# Altium PCB MMC_2_2.PcbDoc (part 2 of 2)
Units mm, origin at the board's own origin, x right, y up, seen from the top; angles counter-clockwise.
Board outline 99.21 x 82.02 mm, 4 copper layers (Top Layer, 3V3, GND, Bottom Layer), stack 0.778 mm thick; 83 components, 83 nets, 360 pads, 124 vias.
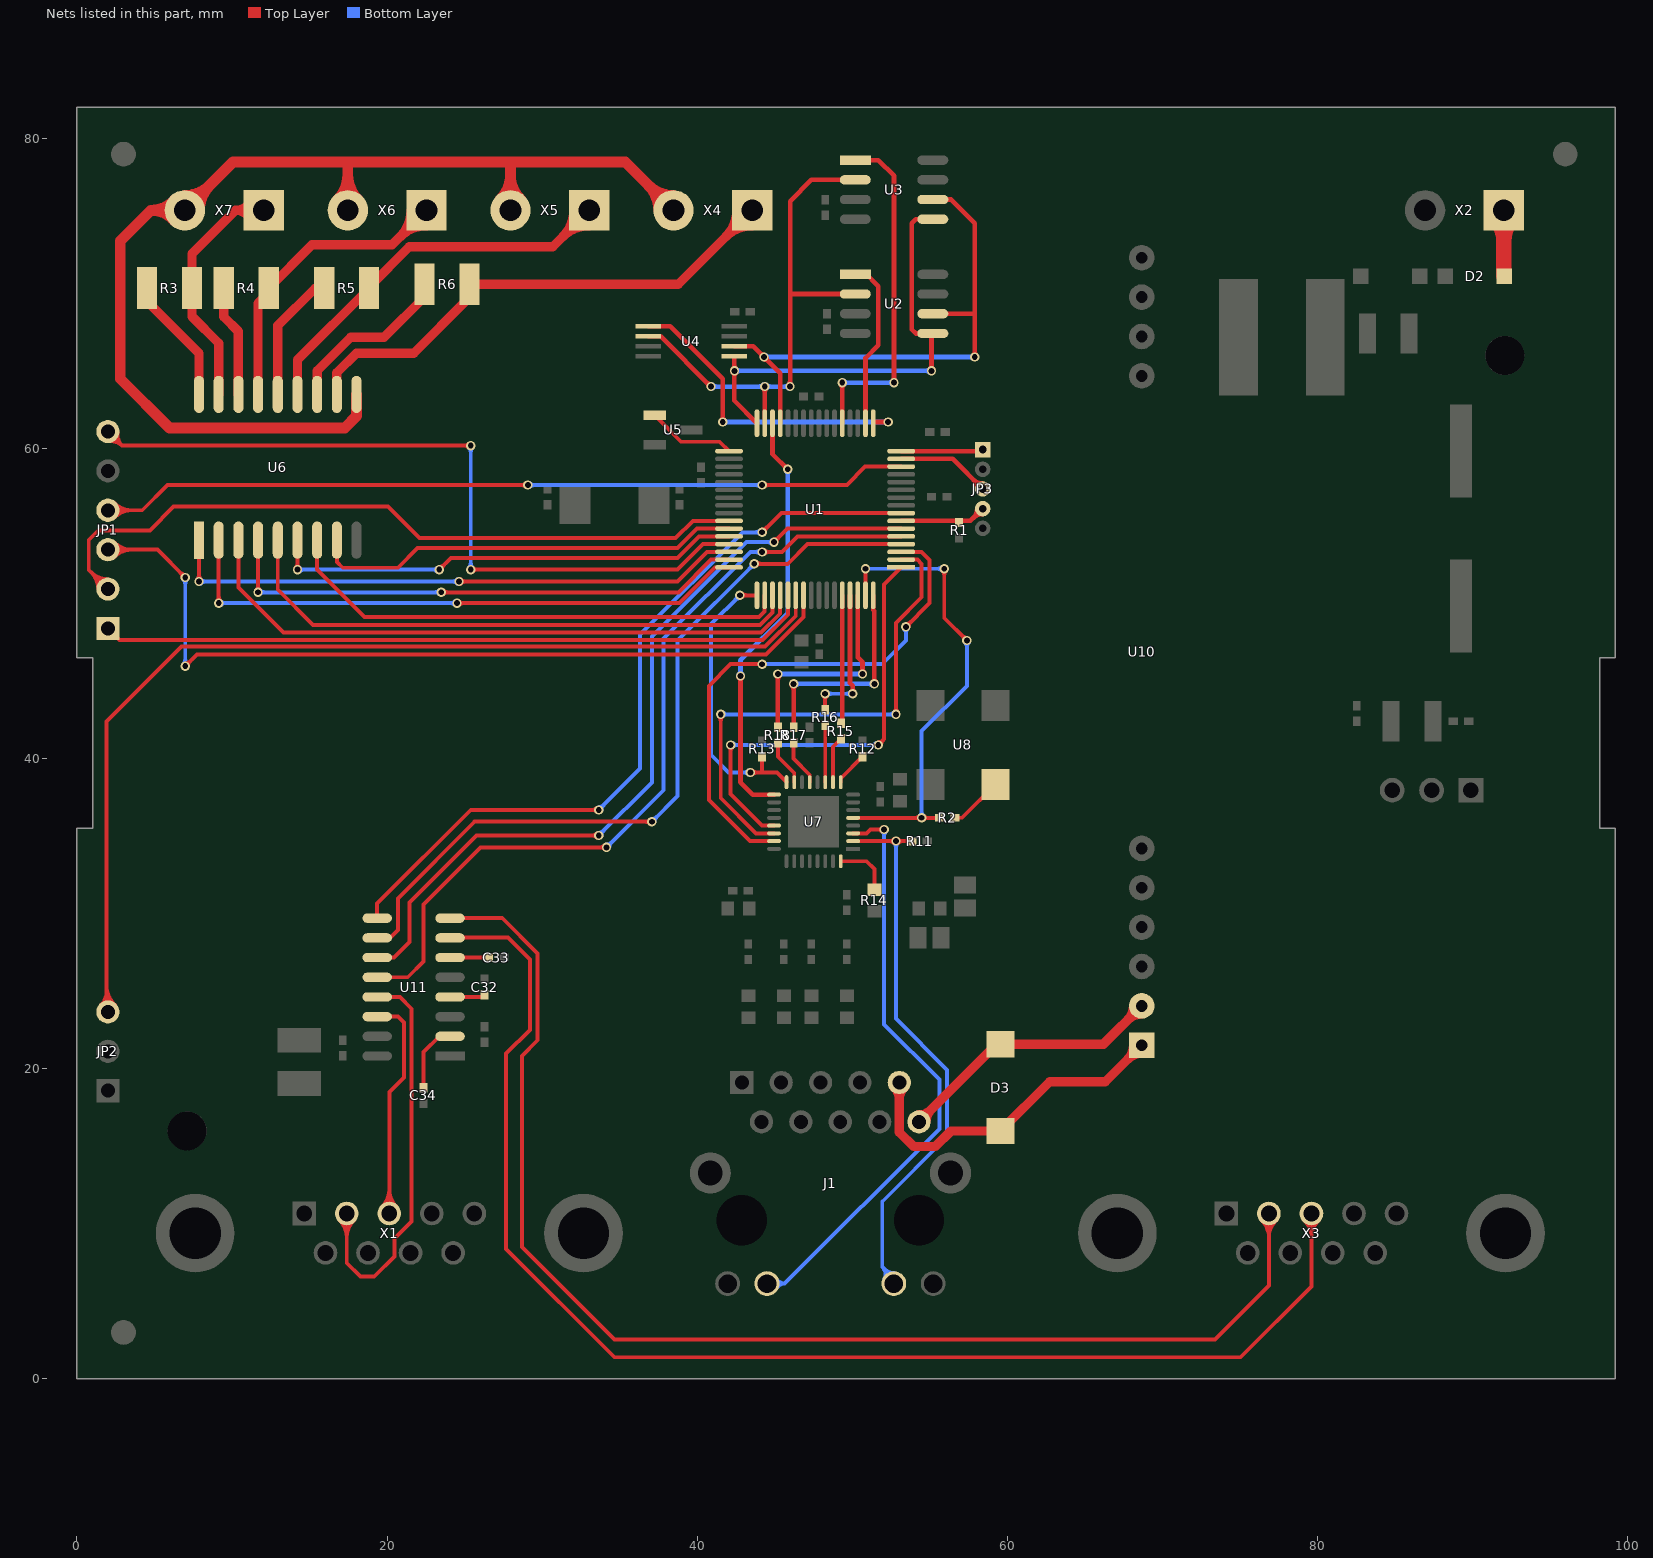
[diagram p4: the nets of this part, all layers, seen from the top]

## Via types
v1: diameter 0.6, hole 0.381, Top Layer to Bottom Layer, 114 vias
v2: diameter 0.66, hole 0.33, Top Layer to Bottom Layer, tented top, 9 vias
v3: diameter 1.2, hole 0.711, Top Layer to Bottom Layer, 1 vias

## Nets (pads, with @x,y where several pads share a name; then routed paths per layer and width w, separated by ;. In a path a pad name is that pad's centre, name@x,y a point inside that pad or via, vN(x,y) a via of type N, cw(c..) or ccw(c..) an arc to the next point about the centre after c; other vN are vias at no path point) (continued)
NetC32_2: C32.2 U11.4 | length 2.3
  Top Layer w0.254: U11.4@24.067,24.638 26.154,24.638 C32.2@26.289,24.773
NetC33_1: C33.1 U11.6 | length 2.5
  Top Layer w0.254: U11.6@24.067,27.178 C33.1@26.551,27.178
NetC34_1: C34.1 U11.2 | length 4.4
  Top Layer w0.254: C34.1@22.352,18.788 22.352,21.082 23.368,22.098 U11.2@24.067,22.098
NetD2_2: D2.2 X2.1 | length 7.3
  Top Layer w1: X2.1@91.474,74.814 cw(c90.109,73.449) 92.04,73.449 cw(c93.971,73.449) X2.1@92.606,74.814 ; X2.1@92.04,75.38 92.04,71.155 D2.2@92.075,71.12
NetD3_1: D3.1 J1.9 U10.1 | length 25.6
  Top Layer w0.6: J1.9@52.727,18.802 cw(c51.959,18.034) 53.045,18.034 cw(c54.131,18.034) J1.9@53.363,18.802 ; J1.9@53.045,19.12 53.045,15.916 53.975,14.986 55.372,14.986 56.382,15.996 D3.1@59.563,15.996 62.744,19.177 66.337,19.177 U10.1@68.68,21.52 ; U10.1@68.155,21.52 cw(c66.888,21.52) 67.784,20.624 cw(c68.68,19.728) U10.1@68.68,20.995
NetD3_2: D3.2 J1.10 U10.2 | length 21.2
  Top Layer w0.6: J1.10@54.315,16.58 59.331,21.596 D3.2@59.563,21.596 66.216,21.596 U10.2@68.68,24.06 ; J1.10@54.315,17.03 ccw(c54.315,18.116) 55.083,17.348 ccw(c55.851,16.58) J1.10@54.765,16.58 ; U10.2@68.155,24.06 cw(c66.888,24.06) 67.784,23.164 cw(c68.68,22.268) U10.2@68.68,23.535
NetJ1_11: J1.11 U7.3 | length 40.8
  Top Layer w0.254: U7.3@50.069,35.191 50.939,35.191 51.181,35.433 v1(52.07,35.433) ; v1@51.948,35.311 ccw(c51.652,35.015) 51.652,35.433 ccw(c51.652,35.851) v1@51.948,35.555
  Bottom Layer w0.254: J1.11@44.51,6.15 45.647,6.15 55.626,16.129 55.626,19.304 52.07,22.86 v1(52.07,35.433) ; J1.11@45.1,5.826 cw(c45.647,5.526) 45.647,6.15 cw(c45.647,6.774) J1.11@45.1,6.474 ; v1@51.948,35.311 cw(c51.652,35.015) 52.07,35.015 cw(c52.488,35.015) v1@52.192,35.311
NetJ1_13: J1.13 R11.2 U7.2 | length 39.6
  Top Layer w0.254: U7.2@50.069,34.691 v1(52.832,34.691) 53.828,34.691 R11.2@53.848,34.671 ; v1@52.71,34.569 ccw(c52.414,34.273) 52.414,34.691 ccw(c52.414,35.109) v1@52.71,34.813 ; v1@52.954,34.569 cw(c53.25,34.273) 53.25,34.691 cw(c53.25,35.109) v1@52.954,34.813
  Bottom Layer w0.254: J1.13@52.082,6.438 ccw(c51.444,6.74) 51.943,7.239 ; 52.125,7.057 ccw(c52.69,7.622) J1.13@52.69,6.823 ; 52.198,6.984 cw(c51.79,6.576) J1.13@52.311,6.329 ; J1.13@52.705,6.477 51.943,7.239 ; v1@52.71,34.569 cw(c52.414,34.273) 52.832,34.273 cw(c53.25,34.273) v1@52.954,34.569 ; v1(52.832,34.691) 52.832,23.241 56.134,19.939 56.134,15.621 51.943,11.43 51.943,7.239
NetJP1_1: JP1.1 U1.53 | length 46.1
  Top Layer w0.254: JP1.1@2,48.41 2.753,47.657 44.228,47.657 45.863,49.292 U1.53@45.863,50.546
NetJP1_2: JP1.2 U1.42 | length 50.9
  Top Layer w0.254: JP1.2@1.377,50.95 ccw(c-0.127,50.95) 0.936,52.014 ccw(c2,53.077) JP1.2@2,51.573 ; JP1.2@1.631,50.95 ccw(c0.74,50.95) 1.37,51.58 ccw(c2,52.21) JP1.2@2,51.319 ; JP1.2@2,50.95 0.762,52.188 0.762,54.102 1.397,54.737 4.699,54.737 6.223,56.261 20.066,56.261 22.098,54.229 38.608,54.229 39.725,55.346 U1.42@42.063,55.346
NetJP1_3: JP1.3 U1.55 | length 60.4
  Top Layer w0.254: JP1.3@2,53.49 5.184,53.49 v1(6.985,51.689) ; JP1.3@2.261,53.229 cw(c2.891,52.599) 2.891,53.49 cw(c2.891,54.381) JP1.3@2.261,53.751 ; JP1.3@2.441,53.049 cw(c3.504,51.986) 3.504,53.49 cw(c3.504,54.994) JP1.3@2.441,53.931 ; v1@6.812,51.689 ccw(c6.394,51.689) 6.69,51.984 ccw(c6.985,52.28) v1@6.985,51.862 ; v1(6.985,45.974) 7.747,46.736 44.45,46.736 46.863,49.149 U1.55@46.863,50.546 ; v1@6.985,46.147 ccw(c6.985,46.565) 7.28,46.269 ccw(c7.576,45.974) v1@7.158,45.974
  Bottom Layer w0.254: v1@6.863,46.096 ccw(c6.567,46.392) 6.985,46.392 ccw(c7.403,46.392) v1@7.107,46.096 ; v1@6.863,51.567 cw(c6.567,51.271) 6.985,51.271 cw(c7.403,51.271) v1@7.107,51.567 ; v1(6.985,45.974) v1(6.985,51.689)
NetJP1_4: JP1.4 U1.14 | length 58.7
  Top Layer w0.254: JP1.4@2,56.03 4.214,56.03 5.842,57.658 v1(29.083,57.658) ; JP1.4@2.261,55.769 cw(c2.891,55.139) 2.891,56.03 cw(c2.891,56.921) JP1.4@2.261,56.291 ; JP1.4@2.441,55.589 cw(c3.504,54.526) 3.504,56.03 cw(c3.504,57.534) JP1.4@2.441,56.471 ; v1@28.961,57.536 ccw(c28.665,57.24) 28.665,57.658 ccw(c28.665,58.076) v1@28.961,57.78 ; v1(44.196,57.658) 49.657,57.658 50.845,58.846 U1.14@53.163,58.846 ; v1@44.318,57.536 cw(c44.614,57.24) 44.614,57.658 cw(c44.614,58.076) v1@44.318,57.78
  Bottom Layer w0.254: v1(29.083,57.658) v1(44.196,57.658) ; v1@29.205,57.536 cw(c29.501,57.24) 29.501,57.658 cw(c29.501,58.076) v1@29.205,57.78 ; v1@44.074,57.536 ccw(c43.778,57.24) 43.778,57.658 ccw(c43.778,58.076) v1@44.074,57.78
NetJP1_6: JP1.6 U1.45 | length 54.7
  Top Layer w0.254: JP1.6@2,61.11 2.912,60.198 ; JP1.6@2.042,60.743 cw(c2.112,60.141) 2.54,60.57 cw(c2.969,60.998) JP1.6@2.367,61.068 ; JP1.6@2.071,60.491 cw(c2.188,59.474) 2.912,60.198 ; JP1.6@2.619,61.039 ccw(c3.636,60.922) 2.912,60.198 ; v1@25.278,60.076 ccw(c24.982,59.78) 24.982,60.198 ccw(c24.982,60.616) v1@25.278,60.32 ; v1(25.4,60.198) 2.912,60.198 ; v1(25.4,52.2) 38.738,52.2 40.384,53.846 U1.45@42.063,53.846 ; v1@25.522,52.078 cw(c25.818,51.782) 25.818,52.2 cw(c25.818,52.618) v1@25.522,52.322
  Bottom Layer w0.254: v1@25.278,52.322 ccw(c24.982,52.618) 25.4,52.618 ccw(c25.818,52.618) v1@25.522,52.322 ; v1@25.278,60.076 cw(c24.982,59.78) 25.4,59.78 cw(c25.818,59.78) v1@25.522,60.076 ; v1(25.4,52.2) v1(25.4,60.198)
NetJP2_3: JP2.3 U1.54 | length 70.6
  Top Layer w0.254: JP2.3@1.559,24.111 ccw(c0.725,24.945) 1.905,24.945 ; 1.905,24.79 ccw(c3.12,24.79) JP2.3@2.261,23.931 ; 1.905,25.403 ccw(c3.733,25.403) JP2.3@2.441,24.111 ; JP2.3@2.159,23.876 1.905,24.13 1.905,42.418 6.731,47.244 44.387,47.244 46.363,49.22 U1.54@46.363,50.546
NetJP3_1: JP3.1 U1.16 | length 5.3
  Top Layer w0.3: U1.16@53.163,59.846 58.322,59.846 JP3.1@58.42,59.944
NetJP3_3: JP3.3 U1.15 | length 7.4
  Top Layer w0.3: U1.15@53.163,59.346 56.478,59.346 JP3.3@58.42,57.404 ; JP3.3@58.07,57.404 ccw(c57.225,57.404) 57.823,58.001 ccw(c58.42,58.599) JP3.3@58.42,57.754
NetJP3_4: JP3.4 R1.1 U1.7 | length 6.9
  Top Layer w0.3: U1.7@53.163,55.346 57.632,55.346 JP3.4@58.42,56.134 ; JP3.4@58.07,56.134 cw(c57.225,56.134) 57.823,55.537 cw(c58.42,54.939) JP3.4@58.42,55.784
NetR2_1: R2.1 U8.3 | length 3.5
  Top Layer w0.254: R2.1@56.634,36.195 57.091,36.195 U8.3@59.25,38.354
NetR2_2: R2.2 U1.63 U7.5 | length 34.8
  Top Layer w0.254: U7.5@50.069,36.191 55.63,36.191 R2.2@55.634,36.195 ; U1.63@50.863,50.546 v1(50.863,52.26) ; 54.056,36.191 ccw(c54.056,36.622) v1@54.361,36.317 ; 54.075,36.191 cw(c54.075,35.787) v1@54.361,36.073 ; v1@54.605,36.073 cw(c54.891,35.787) 54.891,36.191 ; v1@54.605,36.317 ccw(c54.91,36.622) 54.91,36.191 ; v1@55.821,52.138 cw(c55.525,51.842) 55.943,51.842 cw(c56.361,51.842) v1@56.065,52.138 ; v1(55.943,52.26) 55.943,49.086 v1(57.404,47.625) ; v1@57.231,47.625 ccw(c56.813,47.625) 57.109,47.92 ccw(c57.404,48.216) v1@57.404,47.798
  Bottom Layer w0.254: v1(50.863,52.26) v1(55.943,52.26) ; v1@54.361,36.317 ccw(c54.065,36.613) 54.483,36.613 ccw(c54.901,36.613) v1@54.605,36.317 ; v1(54.483,36.195) 54.483,41.783 57.404,44.704 v1(57.404,47.625) ; v1@55.821,52.138 ccw(c55.525,51.842) 55.525,52.26 ccw(c55.525,52.678) v1@55.821,52.382 ; v1@57.282,47.503 cw(c56.986,47.207) 57.404,47.207 cw(c57.822,47.207) v1@57.526,47.503
NetR3_1: R3.1 U6.18 | length 8.2
  Top Layer w0.6: R3.1@4.519,70.358 4.572,70.305 4.572,69.469 7.874,66.167 U6.18@7.874,63.501
NetR3_2: R3.2 U6.17 X7.1 | length 18.2
  Top Layer w0.6: U6.17@9.144,63.501 9.144,66.802 7.419,68.527 R3.2@7.419,70.358 7.419,72.57 10.229,75.38 ; X7.1@11.194,74.847 ccw(c10.229,74.24) 10.229,75.38 ; X7.1@11.194,75.913 cw(c10.229,76.52) 10.229,75.38 ; X7.1@12.04,75.082 X7.1@12.04,75.38 10.229,75.38
NetR4_1: R4.1 U6.16 | length 7.2
  Top Layer w0.6: R4.1@9.472,70.358 9.472,68.506 10.414,67.564 U6.16@10.414,63.501
NetR4_2: R4.2 U6.15 X6.1 | length 23.1
  Top Layer w0.6: U6.15@11.684,63.501 11.684,69.363 R4.2@12.525,70.205 ; R4.2@12.372,70.358 15.166,73.152 20.322,73.152 X6.1@22.55,75.38 ; X6.1@21.55,75.38 cw(c19.136,75.38) 20.843,73.673 cw(c22.55,71.966) X6.1@22.55,74.38
NetR5_1: R5.1 U6.14 | length 8.4
  Top Layer w0.6: U6.14@12.954,63.501 12.954,67.945 15.367,70.358 R5.1@15.949,70.358
NetR5_2: R5.2 U6.13 X5.1 | length 28.9
  Top Layer w0.6: U6.13@14.224,63.501 14.224,65.733 R5.2@18.849,70.358 18.849,70.433 21.441,73.025 30.685,73.025 X5.1@33.04,75.38 ; X5.1@32.04,75.38 cw(c29.626,75.38) 31.333,73.673 cw(c33.04,71.966) X5.1@33.04,74.38
NetR6_1: R6.1 U6.12 | length 11.2
  Top Layer w0.6: U6.12@15.494,63.501 15.494,65.024 17.653,67.183 19.812,67.183 22.426,69.797 R6.1@22.426,70.612
NetR6_2: R6.2 U6.11 X4.1 | length 36.5
  Top Layer w0.6: U6.11@16.764,63.501 16.764,64.897 18.034,66.167 21.717,66.167 25.146,69.596 R6.2@25.146,70.358 ; R6.2@25.326,70.612 38.787,70.612 X4.1@43.555,75.38 ; X4.1@42.555,75.38 cw(c40.141,75.38) 41.848,73.673 cw(c43.555,71.966) X4.1@43.555,74.38
NetR12_1: R12.1 U7.9 | length 2.2
  Top Layer w0.254: U7.9@49.269,38.491 49.269,38.736 R12.1@50.673,40.14
NetR13_1: R13.1 U1.49 U7.16 | length 21.5
  Top Layer w0.254: v1(42.76,50.546) U1.49@43.863,50.546 ; v1@42.882,50.424 cw(c43.177,50.128) 43.177,50.546 cw(c43.177,50.964) v1@42.882,50.668 ; v1(43.434,39.116) 44.196,39.116 ; v1@43.556,38.994 cw(c43.852,38.698) 43.852,39.116 cw(c43.852,39.534) v1@43.556,39.238 ; R13.1@44.188,40.072 44.188,40.132 R13.1@44.196,40.14 44.196,39.116 ; U7.16@45.769,38.491 45.144,39.116 44.196,39.116
  Bottom Layer w0.254: v1@42.587,50.546 cw(c42.169,50.546) 42.464,50.251 cw(c42.76,49.955) v1@42.76,50.373 ; v1(42.76,50.546) 40.894,48.68 40.894,40.259 42.037,39.116 v1(43.434,39.116) ; v1@43.312,38.994 ccw(c43.016,38.698) 43.016,39.116 ccw(c43.016,39.534) v1@43.312,39.238
NetR14_2: R14.2 U7.32 | length 3.7
  Top Layer w0.254: U7.32@49.269,33.391 50.937,33.391 51.435,32.893 R14.2@51.435,31.561
NetR15_1: R15.1 U7.10 | length 3
  Top Layer w0.254: U7.10@48.769,38.491 48.769,40.776 R15.1@49.276,41.283
NetR15_2: R15.2 U1.60 | length 8.3
  Top Layer w0.254: R15.2@49.276,42.283 R15.2@49.363,42.37
  Top Layer w0.3: R15.2@49.363,42.37 U1.60@49.363,50.546
NetR16_1: R16.1 U7.11 | length 3.7
  Top Layer w0.254: R16.1@48.26,42.172 48.269,42.163 U7.11@48.269,38.491
NetR16_2: R16.2 U1.61 | length 11.8
  Top Layer w0.254: v1@48.138,44.074 cw(c47.842,43.778) 48.26,43.778 cw(c48.678,43.778) v1@48.382,44.074 ; R16.2@48.26,43.172 v1(48.26,44.196)
  Top Layer w0.3: U1.61@49.863,50.546 49.863,44.879 50.038,44.704 v1(50.038,44.196) ; v1@49.932,44.302 ccw(c49.676,44.558) 50.038,44.558 ccw(c50.4,44.558) v1@50.144,44.302
  Bottom Layer w0.254: v1(48.26,44.196) v1(50.038,44.196) ; v1@48.382,44.074 cw(c48.678,43.778) 48.678,44.196 cw(c48.678,44.614) v1@48.382,44.318 ; v1@49.916,44.074 ccw(c49.62,43.778) 49.62,44.196 ccw(c49.62,44.614) v1@49.916,44.318
NetR17_1: R17.1 U7.13 | length 3
  Top Layer w0.254: R17.1@46.228,41.029 46.228,40.005 47.269,38.964 U7.13@47.269,38.491
NetR17_2: R17.2 U1.64 | length 16
  Top Layer w0.3: v1@46.122,44.725 cw(c45.866,44.469) 46.228,44.469 cw(c46.59,44.469) v1@46.334,44.725 ; R17.2@46.228,42.029 v1(46.228,44.831) ; v1@51.329,44.937 ccw(c51.073,45.193) 51.435,45.193 ccw(c51.797,45.193) v1@51.541,44.937 ; U1.64@51.363,50.546 51.363,49.602 51.435,49.53 v1(51.435,44.831)
  Bottom Layer w0.3: v1(46.228,44.831) v1(51.435,44.831) ; v1@46.334,44.725 cw(c46.59,44.469) 46.59,44.831 cw(c46.59,45.193) v1@46.334,44.937 ; v1@51.329,44.725 ccw(c51.073,44.469) 51.073,44.831 ccw(c51.073,45.193) v1@51.329,44.937
NetR18_1: R18.1 U7.15 | length 3
  Top Layer w0.254: R18.1@45.212,41.029 45.212,40.132 46.269,39.075 U7.15@46.269,38.491
NetR18_2: R18.2 U1.62 | length 16.4
  Top Layer w0.3: v1@45.106,45.36 cw(c44.85,45.104) 45.212,45.104 cw(c45.574,45.104) v1@45.318,45.36 ; R18.2@45.212,42.029 v1(45.212,45.466) ; U1.62@50.363,50.546 50.363,46.538 50.673,46.228 v1(50.673,45.466) ; v1@50.567,45.572 ccw(c50.311,45.828) 50.673,45.828 ccw(c51.035,45.828) v1@50.779,45.572
  Bottom Layer w0.3: v1(45.212,45.466) v1(50.673,45.466) ; v1@45.318,45.36 cw(c45.574,45.104) 45.574,45.466 cw(c45.574,45.828) v1@45.318,45.572 ; v1@50.567,45.36 ccw(c50.311,45.104) 50.311,45.466 ccw(c50.311,45.828) v1@50.567,45.572
NetU1_1: U1.1 U7.21 | length 31
  Top Layer w0.254: v1@42.042,40.772 cw(c41.746,40.476) 42.164,40.476 cw(c42.582,40.476) v1@42.286,40.772 ; v1(42.164,40.894) 42.164,37.719 44.192,35.691 U7.21@44.969,35.691 ; v1(51.689,40.894) 52.07,41.275 52.07,51.253 U1.1@53.163,52.346 ; v1@51.689,41.067 ccw(c51.689,41.485) 51.984,41.189 ccw(c52.28,40.894) v1@51.862,40.894
  Bottom Layer w0.254: v1(42.164,40.894) v1(51.689,40.894) ; v1@42.286,40.772 cw(c42.582,40.476) 42.582,40.894 cw(c42.582,41.312) v1@42.286,41.016 ; v1@51.567,40.772 ccw(c51.271,40.476) 51.271,40.894 ccw(c51.271,41.312) v1@51.567,41.016
NetU1_2: U1.2 U7.22 | length 35.5
  Top Layer w0.254: v1@41.407,42.746 cw(c41.111,42.45) 41.529,42.45 cw(c41.947,42.45) v1@41.651,42.746 ; v1(41.529,42.868) 41.529,37.465 43.803,35.191 U7.22@44.969,35.191 ; v1@52.71,42.99 ccw(c52.414,43.286) 52.832,43.286 ccw(c53.25,43.286) v1@52.954,42.99 ; v1(52.832,42.868) 52.832,48.768 54.483,50.419 54.483,52.578 54.215,52.846 U1.2@53.163,52.846
  Bottom Layer w0.254: v1(41.529,42.868) v1(52.832,42.868) ; v1@41.651,42.746 cw(c41.947,42.45) 41.947,42.868 cw(c41.947,43.286) v1@41.651,42.99 ; v1@52.71,42.746 ccw(c52.414,42.45) 52.414,42.868 ccw(c52.414,43.286) v1@52.71,42.99
NetU1_3: U1.3 U7.23 | length 35.8
  Top Layer w0.254: v1(44.196,46.101) 42.164,46.101 40.767,44.704 40.767,37.338 43.414,34.691 U7.23@44.969,34.691 ; U1.3@53.163,53.346 54.477,53.346 54.991,52.832 54.991,50.038 v1(53.467,48.514) ; v1@53.467,48.687 ccw(c53.467,49.105) 53.762,48.809 ccw(c54.058,48.514) v1@53.64,48.514
  Bottom Layer w0.254: v1(44.196,46.101) 51.943,46.101 53.467,47.625 v1(53.467,48.514) ; v1@53.345,48.392 cw(c53.049,48.096) 53.467,48.096 cw(c53.885,48.096) v1@53.589,48.392
NetU1_4: U1.4 U11.10 | length 54
  Top Layer w0.254: U11.10@19.367,28.448 20.193,28.448 20.701,28.956 20.701,30.988 25.654,35.941 v1(37.084,35.941) ; v1@36.962,35.819 ccw(c36.666,35.523) 36.666,35.941 ccw(c36.666,36.359) v1@36.962,36.063 ; v1(43.688,52.578) 45.847,52.578 47.115,53.846 U1.4@53.163,53.846 ; v1@43.81,52.456 cw(c44.106,52.16) 44.106,52.578 cw(c44.106,52.996) v1@43.81,52.7
  Bottom Layer w0.254: v1(37.084,35.941) 38.735,37.592 38.735,47.625 v1(43.688,52.578) ; v1@37.084,36.114 ccw(c37.084,36.532) 37.379,36.236 ccw(c37.675,35.941) v1@37.257,35.941 ; v1@43.515,52.578 cw(c43.097,52.578) 43.393,52.283 cw(c43.688,51.987) v1@43.688,52.405
NetU1_5: U1.5 U11.12 | length 56.1
  Top Layer w0.254: U11.12@19.367,25.908 21.336,25.908 22.352,26.924 22.352,30.607 26.035,34.29 v1(34.163,34.29) ; v1@34.041,34.168 ccw(c33.745,33.872) 33.745,34.29 ccw(c33.745,34.708) v1@34.041,34.412 ; v1(44.196,53.34) 45.466,53.34 46.472,54.346 U1.5@53.163,54.346 ; v1@44.318,53.218 cw(c44.614,52.922) 44.614,53.34 cw(c44.614,53.758) v1@44.318,53.462
  Bottom Layer w0.254: v1(34.163,34.29) 37.846,37.973 37.846,47.752 43.434,53.34 v1(44.196,53.34) ; v1@34.163,34.463 ccw(c34.163,34.881) 34.458,34.585 ccw(c34.754,34.29) v1@34.336,34.29 ; v1@44.074,53.218 ccw(c43.778,52.922) 43.778,53.34 ccw(c43.778,53.758) v1@44.074,53.462
NetU1_6: U1.6 U11.11 | length 55
  Top Layer w0.254: U11.11@19.367,27.178 20.447,27.178 21.463,28.194 21.463,30.734 25.781,35.052 v1(33.655,35.052) ; v1@33.533,34.93 ccw(c33.237,34.634) 33.237,35.052 ccw(c33.237,35.47) v1@33.533,35.174 ; v1(44.958,53.975) 45.829,54.846 U1.6@53.163,54.846 ; v1@44.958,54.148 ccw(c44.958,54.566) 45.253,54.27 ccw(c45.549,53.975) v1@45.131,53.975
  Bottom Layer w0.254: v1(33.655,35.052) 37.084,38.481 37.084,47.879 43.18,53.975 v1(44.958,53.975) v1@45.085,53.975 ; v1@33.655,35.225 ccw(c33.655,35.643) 33.95,35.347 ccw(c34.246,35.052) v1@33.828,35.052 ; v1@44.836,53.853 ccw(c44.54,53.557) 44.54,53.975 ccw(c44.54,54.393) v1@44.836,54.097
NetU1_8: U1.8 U11.9 | length 52.9
  Top Layer w0.254: U11.9@19.367,29.718 19.367,30.67 25.4,36.703 v1(33.655,36.703) ; v1@33.533,36.581 ccw(c33.237,36.285) 33.237,36.703 ccw(c33.237,37.121) v1@33.533,36.825 ; v1(44.196,54.61) 45.432,55.846 U1.8@53.163,55.846 ; v1@44.196,54.783 ccw(c44.196,55.201) 44.491,54.905 ccw(c44.787,54.61) v1@44.369,54.61
  Bottom Layer w0.254: v1(33.655,36.703) 36.322,39.37 36.322,48.006 42.926,54.61 v1(44.196,54.61) ; v1@33.655,36.876 ccw(c33.655,37.294) 33.95,36.998 ccw(c34.246,36.703) v1@33.828,36.703 ; v1@44.074,54.488 ccw(c43.778,54.192) 43.778,54.61 ccw(c43.778,55.028) v1@44.074,54.732
NetU1_17: U1.17 U4.1 | length 22.9
  Top Layer w0.3: U4.1@36.849,67.904 38.268,67.904 41.656,64.516 v1(41.656,61.722) ; v1@41.55,61.828 ccw(c41.294,62.084) 41.656,62.084 ccw(c42.018,62.084) v1@41.762,61.828 ; U1.17@51.363,61.646 51.439,61.722 v1(52.324,61.722) ; v1@52.218,61.616 ccw(c51.962,61.36) 51.962,61.722 ccw(c51.962,62.084) v1@52.218,61.828
  Bottom Layer w0.3: v1(41.656,61.722) v1(52.324,61.722) ; v1@41.762,61.616 cw(c42.018,61.36) 42.018,61.722 cw(c42.018,62.084) v1@41.762,61.828 ; v1@52.218,61.616 ccw(c51.962,61.36) 51.962,61.722 ccw(c51.962,62.084) v1@52.218,61.828
NetU1_18: U1.18 U2.1 | length 10.4
  Top Layer w0.3: U2.1@50.8,71.374 51.689,70.485 51.689,66.675 50.863,65.849 U1.18@50.863,61.646
NetU1_21: U1.21 U3.1 | length 24.5
  Top Layer w0.3: v1@49.257,64.156 cw(c49.001,63.9) 49.363,63.9 cw(c49.725,63.9) v1@49.469,64.156 ; U1.21@49.363,61.646 v1(49.363,64.262) ; U3.1@50.205,78.613 51.689,78.613 52.705,77.597 v1(52.705,64.262) ; v1@52.599,64.368 ccw(c52.343,64.624) 52.705,64.624 ccw(c53.067,64.624) v1@52.811,64.368
  Bottom Layer w0.3: v1(49.363,64.262) v1(52.705,64.262) ; v1@49.469,64.156 cw(c49.725,63.9) 49.725,64.262 cw(c49.725,64.624) v1@49.469,64.368 ; v1@52.599,64.156 ccw(c52.343,63.9) 52.343,64.262 ccw(c52.343,64.624) v1@52.599,64.368
NetU1_29: U1.29 U2.6 U3.6 U4.6 | length 38
  Top Layer w0.3: U4.6@42.399,66.604 43.632,66.604 v1(44.323,65.913) 45.363,64.873 U1.29@45.363,61.646 ; v1@44.173,65.913 ccw(c43.811,65.913) 44.067,66.169 ccw(c44.323,66.425) v1@44.323,66.063 ; v1@44.323,65.763 cw(c44.323,65.401) 44.579,65.657 cw(c44.835,65.913) v1@44.473,65.913 ; U2.6@55.205,68.707 57.912,68.707 ; U3.6@55.205,76.073 56.388,76.073 57.912,74.549 57.912,68.707 ; v1@57.806,66.019 ccw(c57.55,66.275) 57.912,66.275 ccw(c58.274,66.275) v1@58.018,66.019 ; v1(57.912,65.913) 57.912,68.707
  Bottom Layer w0.3: v1(44.323,65.913) v1(57.912,65.913) ; v1@44.429,65.807 cw(c44.685,65.551) 44.685,65.913 cw(c44.685,66.275) v1@44.429,66.019 ; v1@57.806,65.807 ccw(c57.55,65.551) 57.55,65.913 ccw(c57.55,66.275) v1@57.806,66.019
NetU1_30: U1.30 U7.17 | length 29.6
  Top Layer w0.3: v1@42.693,45.233 cw(c42.437,44.977) 42.799,44.977 cw(c43.161,44.977) v1@42.905,45.233 ; v1(42.799,45.339) 42.799,38.481 43.589,37.691 U7.17@44.969,37.691 ; U1.30@44.863,61.646 44.863,59.658 v1(45.847,58.674) ; v1@45.697,58.674 ccw(c45.335,58.674) 45.591,58.93 ccw(c45.847,59.186) v1@45.847,58.824
  Bottom Layer w0.3: v1@42.693,45.445 ccw(c42.437,45.701) 42.799,45.701 ccw(c43.161,45.701) v1@42.905,45.445 ; v1(42.799,45.339) 42.799,46.355 45.847,49.403 v1(45.847,58.674) ; v1@45.741,58.568 cw(c45.485,58.312) 45.847,58.312 cw(c46.209,58.312) v1@45.953,58.568
NetU1_31: U1.31 U2.2 U3.2 U4.2 | length 37.8
  Top Layer w0.3: U4.2@36.849,67.254 37.648,67.254 v1(40.894,64.008) ; v1@40.744,64.008 ccw(c40.382,64.008) 40.638,64.264 ccw(c40.894,64.52) v1@40.894,64.158 ; v1@44.257,63.902 cw(c44.001,63.646) 44.363,63.646 cw(c44.725,63.646) v1@44.469,63.902 ; U1.31@44.363,61.646 v1(44.363,64.008) ; v1@45.894,64.114 ccw(c45.638,64.37) 46,64.37 ccw(c46.362,64.37) v1@46.106,64.114 ; v1(46,64.008) 46,69.977 ; U2.2@50.205,69.977 46,69.977 ; U3.2@50.205,77.343 47.371,77.343 46,75.972 46,69.977
  Bottom Layer w0.3: v1(40.894,64.008) v1(44.363,64.008) v1(46,64.008) ; v1@41,63.902 cw(c41.256,63.646) 41.256,64.008 cw(c41.256,64.37) v1@41,64.114 ; v1@44.257,63.902 ccw(c44.001,63.646) 44.001,64.008 ccw(c44.001,64.37) v1@44.257,64.114 ; v1@44.469,63.902 cw(c44.725,63.646) 44.725,64.008 cw(c44.725,64.37) v1@44.469,64.114 ; v1@45.894,63.902 ccw(c45.638,63.646) 45.638,64.008 ccw(c45.638,64.37) v1@45.894,64.114
NetU1_32: U1.32 U2.5 U3.5 U4.5 | length 32.7
  Top Layer w0.3: v1@42.312,64.918 cw(c42.102,64.708) 42.399,64.708 ; v1@42.312,65.13 ccw(c42.102,65.34) 42.399,65.34 ; 42.399,64.616 cw(c42.826,64.616) v1@42.524,64.918 ; 42.399,65.432 ccw(c42.826,65.432) v1@42.524,65.13 ; U4.5@42.399,65.954 42.399,63.11 U1.32@43.863,61.646 ; v1@55.012,65.13 ccw(c54.756,65.386) 55.118,65.386 ccw(c55.48,65.386) v1@55.224,65.13 ; v1(55.118,65.024) 55.118,67.35 U2.5@55.205,67.437 54.102,67.437 53.848,67.691 53.848,74.549 54.102,74.803 U3.5@55.205,74.803
  Bottom Layer w0.3: v1(42.418,65.024) v1(55.118,65.024) ; v1@42.524,64.918 cw(c42.78,64.662) 42.78,65.024 cw(c42.78,65.386) v1@42.524,65.13 ; v1@55.012,64.918 ccw(c54.756,64.662) 54.756,65.024 ccw(c54.756,65.386) v1@55.012,65.13
NetU1_33: U1.33 U5.3 | length 5.8
  Top Layer w0.254: U5.3@37.274,62.164 37.274,62.147 38.969,60.452 41.457,60.452 U1.33@42.063,59.846
NetU1_43: U1.43 U6.8 | length 27.9
  Top Layer w0.254: U6.8@16.764,54.101 16.764,52.705 17.145,52.324 20.701,52.324 21.971,53.594 38.735,53.594 39.987,54.846 U1.43@42.063,54.846
NetU1_44: U1.44 U6.6 | length 33.3
  Top Layer w0.254: v1@14.102,52.319 ccw(c13.806,52.615) 14.224,52.615 ccw(c14.642,52.615) v1@14.346,52.319 ; v1(14.224,52.197) U6.6@14.224,54.101 ; v1(23.368,52.197) 24.13,52.959 38.735,52.959 40.122,54.346 U1.44@42.063,54.346 ; v1@23.368,52.37 ccw(c23.368,52.788) 23.663,52.492 ccw(c23.959,52.197) v1@23.541,52.197
  Bottom Layer w0.254: v1(14.224,52.197) v1(23.368,52.197) ; v1@14.346,52.075 cw(c14.642,51.779) 14.642,52.197 cw(c14.642,52.615) v1@14.346,52.319 ; v1@23.246,52.075 ccw(c22.95,51.779) 22.95,52.197 ccw(c22.95,52.615) v1@23.246,52.319
NetU1_46: U1.46 U6.1 | length 40.3
  Top Layer w0.254: v1@7.752,51.557 ccw(c7.456,51.853) 7.874,51.853 ccw(c8.292,51.853) v1@7.996,51.557 ; v1(7.874,51.435) U6.1@7.874,54.101 ; v1(24.638,51.435) 38.735,51.435 40.646,53.346 U1.46@42.063,53.346 ; v1@24.76,51.313 cw(c25.056,51.017) 25.056,51.435 cw(c25.056,51.853) v1@24.76,51.557
  Bottom Layer w0.254: v1(7.874,51.435) v1(24.638,51.435) ; v1@7.996,51.313 cw(c8.292,51.017) 8.292,51.435 cw(c8.292,51.853) v1@7.996,51.557 ; v1@24.516,51.313 ccw(c24.22,51.017) 24.22,51.435 ccw(c24.22,51.853) v1@24.516,51.557
NetU1_47: U1.47 U6.4 | length 37.2
  Top Layer w0.254: v1@11.562,50.862 ccw(c11.266,51.158) 11.684,51.158 ccw(c12.102,51.158) v1@11.806,50.862 ; v1(11.684,50.74) U6.4@11.684,54.101 ; v1(23.5,50.74) 38.802,50.74 40.908,52.846 U1.47@42.063,52.846 ; v1@23.622,50.618 cw(c23.918,50.322) 23.918,50.74 cw(c23.918,51.158) v1@23.622,50.862
  Bottom Layer w0.254: v1(11.684,50.74) v1(23.5,50.74) ; v1@11.806,50.618 cw(c12.102,50.322) 12.102,50.74 cw(c12.102,51.158) v1@11.806,50.862 ; v1@23.378,50.618 ccw(c23.082,50.322) 23.082,50.74 ccw(c23.082,51.158) v1@23.378,50.862
NetU1_48: U1.48 U6.2 | length 40.6
  Top Layer w0.254: v1@9.022,50.16 ccw(c8.726,50.456) 9.144,50.456 ccw(c9.562,50.456) v1@9.266,50.16 ; v1(9.144,50.038) U6.2@9.144,54.101 ; v1(24.511,50.038) 38.862,50.038 41.17,52.346 U1.48@42.063,52.346 ; v1@24.633,49.916 cw(c24.929,49.62) 24.929,50.038 cw(c24.929,50.456) v1@24.633,50.16
  Bottom Layer w0.254: v1(9.144,50.038) v1(24.511,50.038) ; v1@9.266,49.916 cw(c9.562,49.62) 9.562,50.038 cw(c9.562,50.456) v1@9.266,50.16 ; v1@24.389,49.916 ccw(c24.093,49.62) 24.093,50.038 ccw(c24.093,50.456) v1@24.389,50.16
NetU1_50: U1.50 U6.7 | length 33.2
  Top Layer w0.254: U6.7@15.494,54.101 15.494,52.197 18.542,49.149 44.006,49.149 44.363,49.506 U1.50@44.363,50.546
NetU1_51: U1.51 U6.5 | length 37.5
  Top Layer w0.254: U6.5@12.954,54.101 12.954,50.927 15.24,48.641 44.069,48.641 44.863,49.435 U1.51@44.863,50.546
NetU1_52: U1.52 U6.3 | length 40.9
  Top Layer w0.254: U6.3@10.414,54.101 10.414,51.054 13.335,48.133 44.133,48.133 45.363,49.363 U1.52@45.363,50.546
NetU11_7: U11.7 X3.3 | length 90.3
  Top Layer w0.254: U11.7@24.067,28.448 24.086,28.467 27.794,28.467 29.21,27.051 29.21,22.517 27.686,20.993 27.686,8.382 34.671,1.397 75.057,1.397 79.63,5.97 X3.3@79.63,10.67 ; X3.3@79.181,10.221 cw(c78.097,9.137) 79.63,9.137 cw(c81.163,9.137) X3.3@80.079,10.221 ; X3.3@79.361,10.401 cw(c78.71,9.75) 79.63,9.75 cw(c80.55,9.75) X3.3@79.899,10.401
NetU11_8: U11.8 X3.2 | length 86.5
  Top Layer w0.254: U11.8@24.067,29.718 27.432,29.718 29.718,27.432 29.718,21.844 28.702,20.828 28.702,8.509 34.671,2.54 73.406,2.54 76.887,6.021 X3.2@76.887,10.67 ; X3.2@76.438,10.221 cw(c75.354,9.137) 76.887,9.137 cw(c78.42,9.137) X3.2@77.336,10.221 ; X3.2@76.617,10.401 cw(c75.967,9.75) 76.887,9.75 cw(c77.807,9.75) X3.2@77.156,10.401
NetU11_13: U11.13 X1.2 | length 30
  Top Layer w0.254: X1.2@16.955,10.221 cw(c15.871,9.137) 17.404,9.137 cw(c18.937,9.137) X1.2@17.853,10.221 ; X1.2@17.134,10.401 cw(c16.484,9.75) 17.404,9.75 cw(c18.324,9.75) X1.2@17.673,10.401 ; X1.2@17.404,10.67 17.404,7.488 18.288,6.604 19.177,6.604 20.48,7.907 20.48,9.05 21.59,10.16 21.59,23.876 20.828,24.638 U11.13@19.367,24.638
NetU11_14: U11.14 X1.3 | length 18.4
  Top Layer w0.254: U11.14@19.367,23.368 20.701,23.368 21.082,22.987 21.082,19.431 20.147,18.496 X1.3@20.147,10.67 ; X1.3@19.698,11.119 ccw(c18.614,12.203) 20.147,12.203 ccw(c21.68,12.203) X1.3@20.596,11.119 ; X1.3@19.878,10.939 ccw(c19.227,11.59) 20.147,11.59 ccw(c21.067,11.59) X1.3@20.416,10.939
VCC: U6.10 X4.2 X5.2 X6.2 X7.2 | length 90.2
  Top Layer w0.6: 17.47,78.43 17.526,78.486 ; 27.94,78.486 27.96,78.466
  Top Layer w0.7: X7.2@6.267,74.73 ccw(c4.768,73.326) 4.768,75.38 ; X7.2@6.267,76.03 cw(c4.768,77.434) 4.768,75.38 ; X7.2@6.96,76.33 ccw(c6.96,78.624) 8.582,77.002 ccw(c10.204,75.38) X7.2@7.91,75.38 ; X6.2@16.798,76.052 ccw(c15.176,77.674) 17.47,77.674 ccw(c19.764,77.674) X6.2@18.142,76.052 ; X6.2@17.47,75.38 17.47,78.43 ; U6.10@18.034,63.501 18.034,62.103 17.272,61.341 5.969,61.341 2.794,64.516 2.794,73.406 4.768,75.38 ; X5.2@27.288,76.052 ccw(c25.666,77.674) 27.96,77.674 ccw(c30.254,77.674) X5.2@28.632,76.052 ; X5.2@27.96,75.38 27.96,78.466 ; X4.2@37.525,75.38 ccw(c35.231,75.38) 36.853,77.002 ccw(c38.475,78.624) X4.2@38.475,76.33 ; X4.2@38.475,75.38 35.369,78.486 27.94,78.486 17.526,78.486 10.066,78.486 X7.2@6.96,75.38 4.768,75.38
pads on no net: J1.7 J1.8 J1.MH3 J1.MH4 M1.0 M2.0 M3.0 U1.11 U1.12 U1.13 U1.22 U1.23 U1.24 U1.27 U1.28 U1.34 U1.35 U1.36 U1.37 U1.58 U1.59 U4.3 U7.4 U7.7 U7.8 U7.14 U7.18 U7.19 U7.20 U7.26 U10.3 U10.4 U10.5 U10.6 U10.9 U10.10 X1.1 X1.4 X1.5 X1.6 X1.7 X1.8 X1.9 X3.1 X3.4 X3.5 X3.6 X3.7 X3.8 X3.9

## Polygon pours and split planes (outlines as drawn)
GND on GND "GND" (solid, pour order 11): 3.048,80.645 3.048,0.635 96.127,0.635 96.509,0.635 96.509,80.645
NetC16_1 on 3V3 "3V3" (solid, pour order 5): 40.005,14.732 52.07,14.732 52.07,20.701 54.61,20.701 54.61,31.369 51.054,34.925 43.942,34.925 40.005,32.385 40.005,14.732
3V3 on 3V3 "3V3" (solid, pour order 9): 39.497,15.24 39.497,32.512 43.815,35.306 51.181,35.306 59.817,26.67 59.817,15.24 96.647,15.24 96.647,78.486 3.429,78.486 3.556,78.486 3.556,15.24 39.497,15.24

## Other copper
Top Layer:
  text "MN7" at 11.176,41.402 h2.2
  text "MMC 2.2" at 11.1,39.345 h1.27
  text "PN10010" at 11.011,37.49 h1.3
Bottom Layer:
  rectangle net GND: 43.942,32.766 51.054,39.497

## Silkscreen, mask and mechanical layers (free items; w line width, h text height)
Top Solder:
  text "MN7" at 11.176,41.402 h2.2
Fail:
  lines w0.05: -27.305,42.164 -27.305,91.567 -27.051,91.567 8.509,91.567 8.509,42.164 -27.305,42.164
Mechanical 17:
  lines w0.05: 3.556,15.24 39.497,15.24 39.497,32.512 43.815,35.306 51.181,35.306 59.817,26.67 59.817,15.24 96.647,15.24 96.647,78.486 3.556,78.486 3.556,15.24 ; 40.005,14.732 52.07,14.732 52.07,20.701 54.61,20.701 54.61,31.369 51.054,34.925 43.942,34.925 40.005,32.385 40.005,14.732
Outline:
  the board outline again, w0.254

## Text inside footprints (layer, text, board x,y; h text height)
C30: Top Overlay "+" at 15.351,17.697 h0.6 r270
X1: Top Overlay "6" at 12.527,7.368 h1.97; Top Overlay "9" at 27.386,7.495 h1.97; Top Overlay "5" at 27.386,10.035 h1.97; Top Overlay "1" at 12.527,10.035 h1.97
X3: Top Overlay "6" at 72.01,7.368 h1.97; Top Overlay "9" at 86.869,7.495 h1.97; Top Overlay "5" at 86.869,10.035 h1.97; Top Overlay "1" at 72.01,10.035 h1.97